# EAGLE board mainboard (EAGLE 7.6.0)
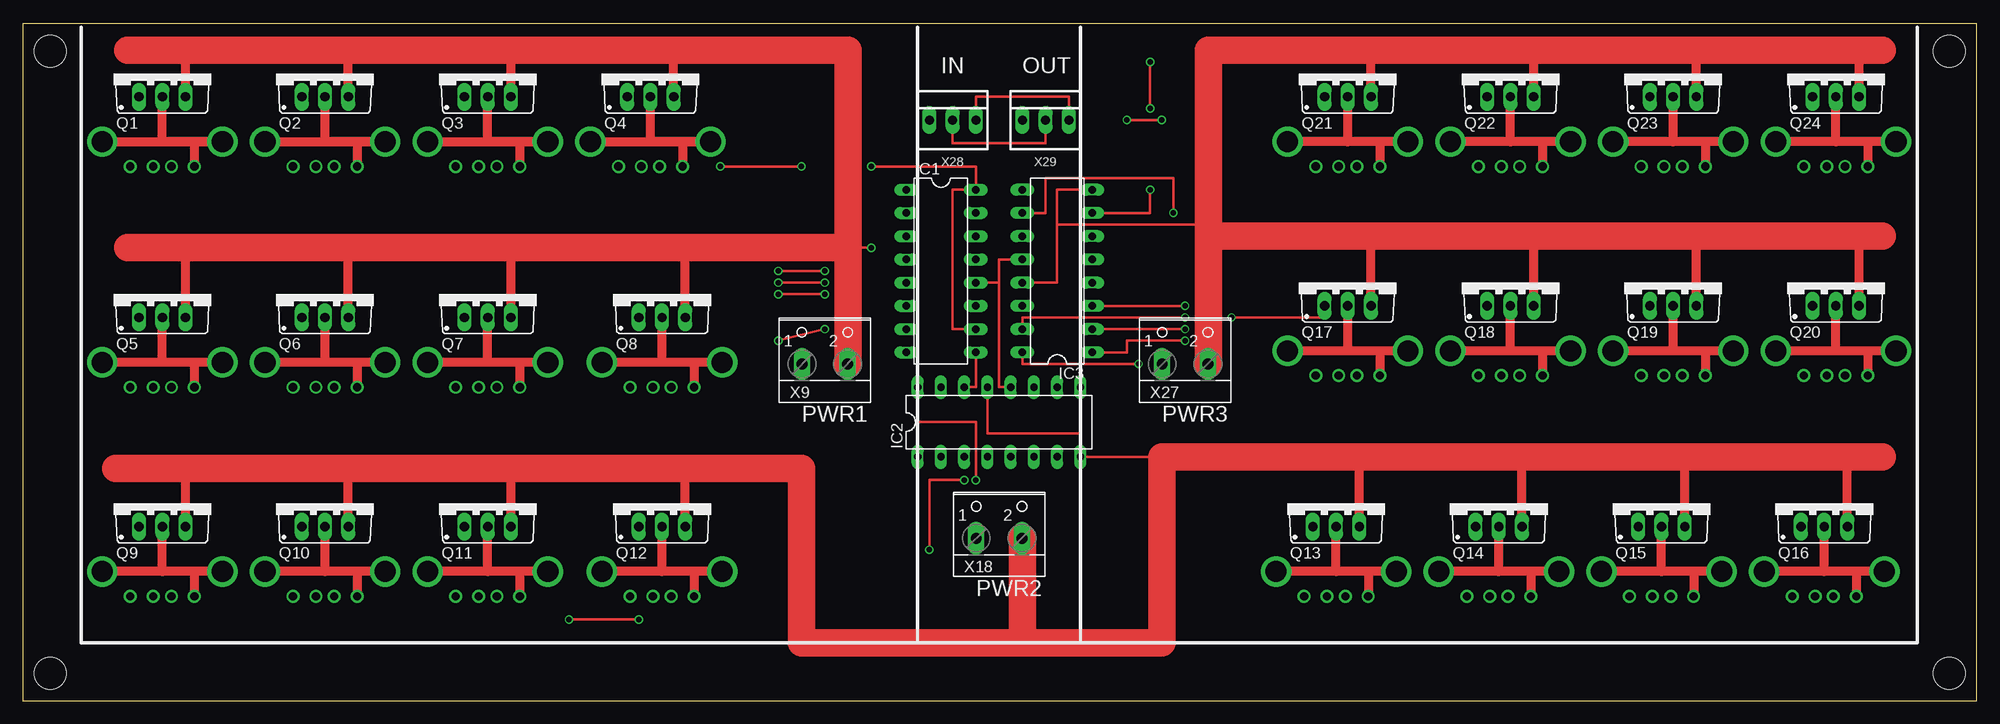
[diagram p0: board, top side]
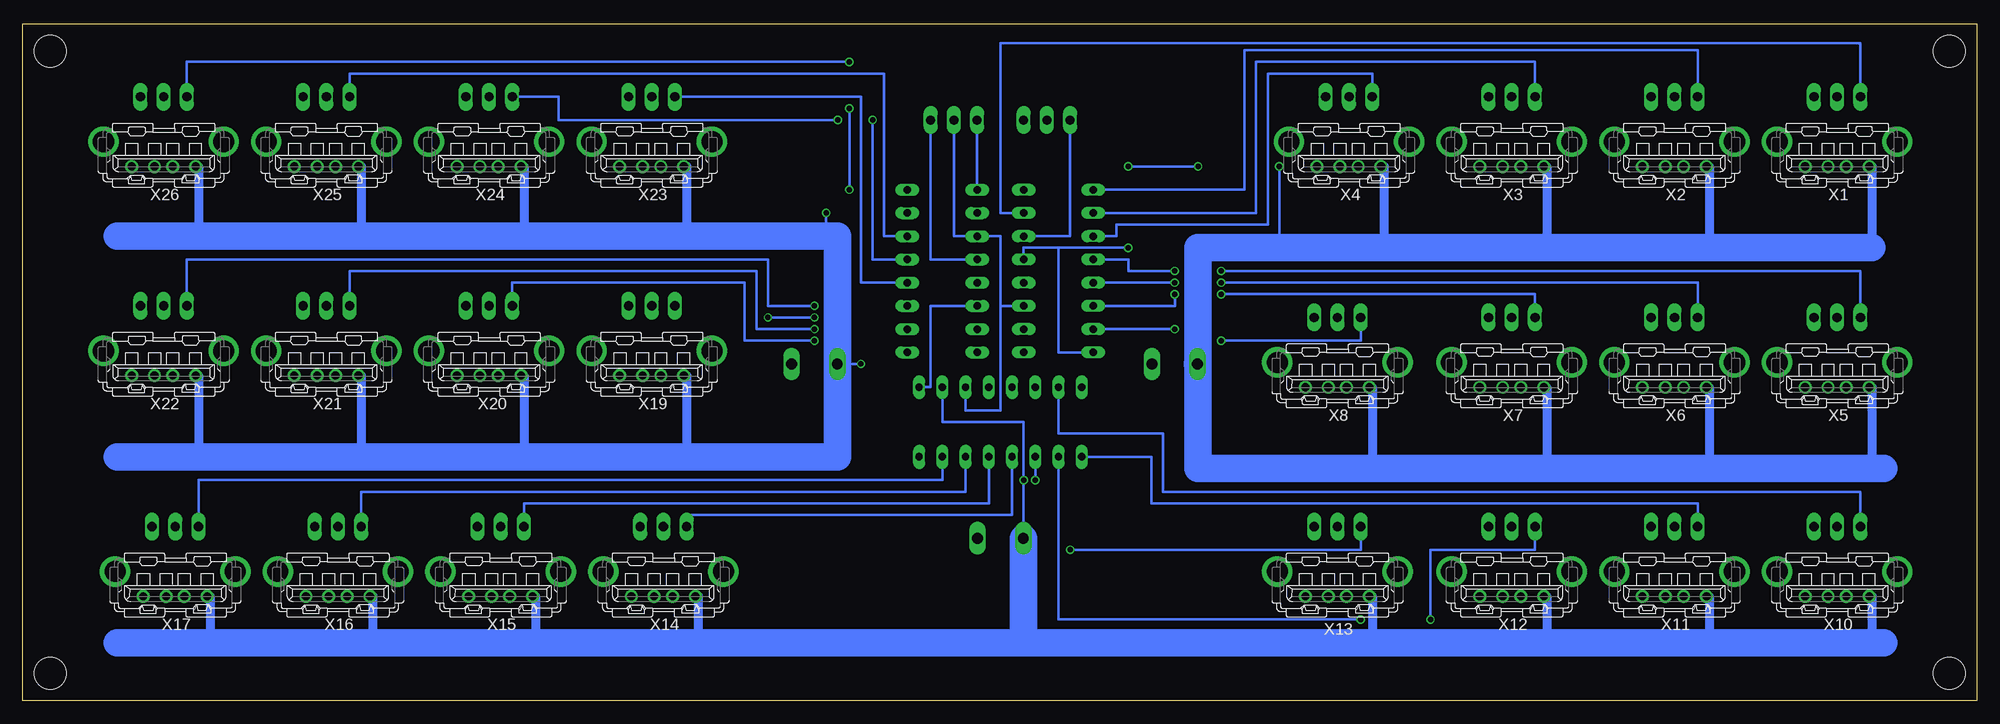
[diagram p1: board, bottom side, seen from below]

Size 213.5 x 74 mm. Coordinates in mm from the lower left corner, seen from the top.
Outline: 0,0 213.5,0 213.5,74 0,74 0,0
Copper layers (1*16): Top 0.035mm / dielectric 1.5mm / Bottom 0.035mm
Design rules "SeeedStudio_2layer_DRU_no_angle_20140221": minimum track width 6mil, minimum drill 12mil, track to track 6mil, track to pad 6mil, pad to pad 6mil, via to via 6mil, smd to smd 0mil, copper to edge 10mil, drill to drill 10mil, minimum pad ring 10mil, minimum via ring 6mil, stop-mask expansion 2mil, vias tented up to drill 100mil, thermal gap 10mil
Holes 3.5 mm at 210.5,71 210.5,3 3,3 3,71

## Footprints (pad centres in the part's own frame; a part is rotated, then mirrored left to right if it is on the bottom)
DIL16 = drill 0.813 long: 1 -8.89,-3.81; 2 -6.35,-3.81; 3 -3.81,-3.81; 4 -1.27,-3.81; 5 1.27,-3.81; 6 3.81,-3.81; 7 6.35,-3.81; 8 8.89,-3.81; 9 8.89,3.81; 10 6.35,3.81; 11 3.81,3.81; 12 1.27,3.81; 13 -1.27,3.81; 14 -3.81,3.81; 15 -6.35,3.81; 16 -8.89,3.81
TO220BV = drill 1.016 long: D 0,-2.54; G -2.54,-2.54; S 2.54,-2.54
KUSBVX = drill 0.9 pad 1.3: 1 3.5,0; 2 1,0; 3 -1,0; 4 -3.5,0 | drill 2.3 pad 2.8: M1 -6.57,2.71; M2 6.57,2.71
W237-102 = drill 1.194 long: 1 -2.5,-1.27; 2 2.5,-1.27
22-23-2031 = drill 1 long: 1 -2.54,0; 2 0,0; 3 2.54,0

## Placement (x,y rotation side)
IC1  74HC595N  [DIL16]  100.33,46.99 270 top
IC2  74HC595N  [DIL16]  106.68,30.48 0 top
IC3  74HC595N  [DIL16]  113.03,46.99 90 top
Q1  IRF540  [TO220BV]  15.24,68.58 0 top
Q2  IRF540  [TO220BV]  33.02,68.58 0 top
Q3  IRF540  [TO220BV]  50.8,68.58 0 top
Q4  IRF540  [TO220BV]  68.58,68.58 0 top
Q5  IRF540  [TO220BV]  15.24,44.45 0 top
Q6  IRF540  [TO220BV]  33.02,44.45 0 top
Q7  IRF540  [TO220BV]  50.8,44.45 0 top
Q8  IRF540  [TO220BV]  69.85,44.45 0 top
Q9  IRF540  [TO220BV]  15.24,21.59 0 top
Q10  IRF540  [TO220BV]  33.02,21.59 0 top
Q11  IRF540  [TO220BV]  50.8,21.59 0 top
Q12  IRF540  [TO220BV]  69.85,21.59 0 top
Q13  IRF540  [TO220BV]  143.51,21.59 0 top
Q14  IRF540  [TO220BV]  161.29,21.59 0 top
Q15  IRF540  [TO220BV]  179.07,21.59 0 top
Q16  IRF540  [TO220BV]  196.85,21.59 0 top
Q17  IRF540  [TO220BV]  144.78,45.72 0 top
Q18  IRF540  [TO220BV]  162.56,45.72 0 top
Q19  IRF540  [TO220BV]  180.34,45.72 0 top
Q20  IRF540  [TO220BV]  198.12,45.72 0 top
Q21  IRF540  [TO220BV]  144.78,68.58 0 top
Q22  IRF540  [TO220BV]  162.56,68.58 0 top
Q23  IRF540  [TO220BV]  180.34,68.58 0 top
Q24  IRF540  [TO220BV]  198.12,68.58 0 top
X1  KUSBVX  [KUSBVX]  15.24,58.42 0 bottom
X2  KUSBVX  [KUSBVX]  33.02,58.42 0 bottom
X3  KUSBVX  [KUSBVX]  50.8,58.42 0 bottom
X4  KUSBVX  [KUSBVX]  68.58,58.42 0 bottom
X5  KUSBVX  [KUSBVX]  15.24,34.29 0 bottom
X6  KUSBVX  [KUSBVX]  33.02,34.29 0 bottom
X7  KUSBVX  [KUSBVX]  50.8,34.29 0 bottom
X8  KUSBVX  [KUSBVX]  69.85,34.29 0 bottom
X9  5v  [W237-102]  87.63,38.1 0 top
X10  KUSBVX  [KUSBVX]  15.24,11.43 0 bottom
X11  KUSBVX  [KUSBVX]  33.02,11.43 0 bottom
X12  KUSBVX  [KUSBVX]  50.8,11.43 0 bottom
X13  KUSBVX  [KUSBVX]  69.85,11.43 0 bottom
X14  KUSBVX  [KUSBVX]  143.51,11.43 0 bottom
X15  KUSBVX  [KUSBVX]  161.29,11.43 0 bottom
X16  KUSBVX  [KUSBVX]  179.07,11.43 0 bottom
X17  KUSBVX  [KUSBVX]  196.85,11.43 0 bottom
X18  5v  [W237-102]  106.68,19.05 0 top
X19  KUSBVX  [KUSBVX]  144.78,35.56 0 bottom
X20  KUSBVX  [KUSBVX]  162.56,35.56 0 bottom
X21  KUSBVX  [KUSBVX]  180.34,35.56 0 bottom
X22  KUSBVX  [KUSBVX]  198.12,35.56 0 bottom
X23  KUSBVX  [KUSBVX]  144.78,58.42 0 bottom
X24  KUSBVX  [KUSBVX]  162.56,58.42 0 bottom
X25  KUSBVX  [KUSBVX]  180.34,58.42 0 bottom
X26  KUSBVX  [KUSBVX]  198.12,58.42 0 bottom
X27  5v  [W237-102]  127,38.1 0 top
X28  22-23-2031  [22-23-2031]  101.6,63.5 0 top
X29  22-23-2031  [22-23-2031]  111.76,63.5 0 top

## Library data of the parts
IC1-IC3 = 74xx-eu
Q1-Q24 = transistor-power
X1-X8 X10-X17 X19-X26 = con-kycon
X9 X18 X27 = con-wago-500; MPN: 237-102; OC_FARNELL: unknown; OC_NEWARK: 70K9898
X28 X29 = con-molex; MF: MOLEX; MPN: 22-23-2031; OC_FARNELL: 1462950; OC_NEWARK: 30C0862

## Nets
B$1: IC2.8 IC2.13 Q9.S Q10.S Q11.S Q12.S Q13.S Q14.S Q15.S Q16.S X18.2
B$2: IC1.8 IC1.13 Q1.S Q2.S Q3.S Q4.S Q5.S Q6.S Q7.S Q8.S X9.2
B$3: IC3.8 IC3.13 Q17.S Q18.S Q19.S Q20.S Q21.S Q22.S Q23.S Q24.S X27.2
N$1: IC1.15 Q1.G
N$2: IC1.1 Q2.G
N$3: IC1.2 Q3.G
N$4: IC1.3 Q4.G
N$5: IC1.4 Q5.G
N$6: IC1.5 Q6.G
N$7: IC1.7 Q8.G
N$8: IC1.6 Q7.G
N$9: Q1.D X1.4 X1.M1 X1.M2
N$10: Q11.D X12.4 X12.M1 X12.M2
N$11: Q3.D X3.4 X3.M1 X3.M2
N$12: Q4.D X4.4 X4.M1 X4.M2
N$13: Q5.D X5.4 X5.M1 X5.M2
N$14: IC1.10 IC1.16 X1.1 X2.1 X3.1 X4.1 X5.1 X6.1 X7.1 X8.1 X9.1
N$15: Q7.D X7.4 X7.M1 X7.M2
N$16: Q16.D X17.4 X17.M1 X17.M2
N$17: Q2.D X2.4 X2.M1 X2.M2
N$18: Q12.D X13.4 X13.M1 X13.M2
N$19: Q6.D X6.4 X6.M1 X6.M2
N$20: Q13.D X14.4 X14.M1 X14.M2
N$21: Q15.D X16.4 X16.M1 X16.M2
N$23: Q14.D X15.4 X15.M1 X15.M2
N$24: IC2.10 IC2.16 X10.1 X11.1 X12.1 X13.1 X14.1 X15.1 X16.1 X17.1 X18.1
N$25: IC1.9 IC2.14
N$26: Q9.D X10.4 X10.M1 X10.M2
N$27: Q10.D X11.4 X11.M1 X11.M2
N$28: IC2.15 Q9.G
N$29: IC2.1 Q10.G
N$30: IC2.2 Q11.G
N$31: IC2.3 Q12.G
N$32: IC2.7 Q16.G
N$33: IC2.4 Q13.G
N$34: IC2.5 Q14.G
N$35: IC2.6 Q15.G
N$36: IC2.9 IC3.14
N$37: IC3.9 X29.1
N$38: Q19.D X21.4 X21.M1 X21.M2
N$39: Q20.D X22.4 X22.M1 X22.M2
N$40: Q21.D X23.4 X23.M1 X23.M2
N$41: Q23.D X25.4 X25.M1 X25.M2
N$43: Q22.D X24.4 X24.M1 X24.M2
N$44: IC3.10 IC3.16 X19.1 X20.1 X21.1 X22.1 X23.1 X24.1 X25.1 X26.1 X27.1
N$45: Q8.D X8.4 X8.M1 X8.M2
N$46: Q17.D X19.4 X19.M1 X19.M2
N$47: Q18.D X20.4 X20.M1 X20.M2
N$48: IC3.15 Q17.G
N$49: IC3.1 Q18.G
N$50: IC3.2 Q19.G
N$51: IC3.3 Q20.G
N$52: IC3.7 Q24.G
N$53: IC3.4 Q21.G
N$54: IC3.5 Q22.G
N$55: IC1.14 X28.1
N$56: IC3.6 Q23.G
N$57: Q24.D X26.4 X26.M1 X26.M2
N$58: IC1.12 IC2.12 IC3.12 X28.3 X29.3
N$59: IC1.11 IC2.11 IC3.11 X28.2 X29.2

## Tracks (layer width: path | path; a pad name or v marks a point on that pad's centre or on a via)
B$1
  Top 0.254: IC2.13 105.41,29.21 115.57,29.21 IC2.8 124.46,26.67
  Top 1: Q12.S 72.39,25.4 | Q11.S 53.34,25.4 | Q10.S 35.56,25.4 | Q9.S 17.78,25.4 | Q16.S 199.39,26.67 | Q15.S 181.61,26.67 | Q14.S 163.83,26.67 | Q13.S 146.05,26.67
  Top 3: X18.2 109.22,17.78 109.22,6.35 | 109.22,6.35 85.09,6.35 85.09,25.4 72.39,25.4 53.34,25.4 35.56,25.4 17.78,25.4 10.16,25.4 | 109.22,6.35 124.46,6.35 124.46,26.67 146.05,26.67 163.83,26.67 181.61,26.67 199.39,26.67 203.2,26.67
B$2  (via drill 0.6)
  Top 0.254: v92.71,49.53 90.17,49.53
  Top 1: Q1.S 17.78,71.12 | Q2.S 35.56,71.12 | Q3.S 53.34,71.12 | Q4.S 71.12,71.12 | Q5.S 17.78,49.53 | Q6.S 35.56,49.53 | Q7.S 53.34,49.53 | Q8.S 72.39,49.53
  Top 3: 90.17,49.53 90.17,71.12 71.12,71.12 53.34,71.12 35.56,71.12 17.78,71.12 11.43,71.12 | X9.2 90.17,36.83 90.17,49.53 | 90.17,49.53 72.39,49.53 53.34,49.53 35.56,49.53 17.78,49.53 11.43,49.53
  Bottom 0.254: IC1.13 104.14,49.53 100.33,49.53 | 100.33,49.53 v92.71,49.53 | 100.33,49.53 100.33,38.1 IC1.8
B$3
  Top 0.254: 113.03,52.07 129.54,52.07 | IC3.13 113.03,45.72 113.03,52.07 | 113.03,52.07 113.03,55.88 IC3.8
  Top 1: Q20.S 200.66,50.8 | Q24.S 200.66,71.12 | Q23.S 182.88,71.12 | Q22.S 165.1,71.12 | Q21.S 147.32,71.12 | Q17.S 147.32,50.8 | Q18.S 165.1,50.8 | Q19.S 182.88,50.8
  Top 3: 129.54,50.8 129.54,36.83 X27.2 | 129.54,50.8 147.32,50.8 165.1,50.8 182.88,50.8 200.66,50.8 203.2,50.8 | 129.54,50.8 129.54,52.07 129.54,71.12 147.32,71.12 165.1,71.12 182.88,71.12 200.66,71.12 203.2,71.12
N$1
  Bottom 0.254: Q1.G 12.7,71.88 106.68,71.88 106.68,53.34 IC1.15
N$2
  Bottom 0.254: Q2.G 30.48,71.12 80.01,71.12 80.01,55.88 IC1.1
N$3
  Bottom 0.254: Q3.G 48.26,69.85 78.74,69.85 78.74,53.34 IC1.2
N$4
  Bottom 0.254: Q4.G 66.04,68.58 77.47,68.58 77.47,52.07 93.98,52.07 93.98,50.8 IC1.3
N$5  (via drill 0.6)
  Top 0.254: v87.63,46.99 v82.55,46.99
  Bottom 0.254: IC1.4 92.71,48.26 92.71,46.99 v87.63,46.99 | v82.55,46.99 12.7,46.99 Q5.G
N$6  (via drill 0.6)
  Top 0.254: v87.63,45.72 v82.55,45.72
  Bottom 0.254: IC1.5 v87.63,45.72 | v82.55,45.72 30.48,45.72 Q6.G
N$7  (via drill 0.6)
  Top 0.254: v87.63,40.64 v82.55,39.37
  Bottom 0.254: IC1.7 v87.63,40.64 | v82.55,39.37 67.31,39.37 Q8.G
N$8  (via drill 0.6)
  Top 0.254: v87.63,44.45 v82.55,44.45
  Bottom 0.254: IC1.6 87.63,43.18 v87.63,44.45 | v82.55,44.45 48.26,44.45 Q7.G
N$9
  Top 1: X1.M2 X1.M1 | X1.M1 18.74,61.13 X1.4 | X1.M1 15.24,61.13 Q1.D
N$10
  Top 1: X12.M1 X12.M2 | X12.M1 50.8,14.14 Q11.D | X12.M1 54.3,14.14 X12.4
N$11
  Top 1: X3.M2 X3.M1 | X3.M1 54.3,61.13 X3.4 | X3.M1 50.8,61.13 Q3.D
N$12
  Top 1: X4.M2 X4.M1 | X4.M1 72.08,61.13 X4.4 | X4.M1 68.58,61.13 Q4.D
N$13
  Top 1: X5.M1 X5.M2 | X5.M1 18.74,37 X5.4 | X5.M1 15.24,37 Q5.D
N$14  (via drill 0.6)
  Top 0.254: v92.71,58.42 104.14,58.42 IC1.16 101.6,55.88 101.6,40.64 IC1.10 | v85.09,58.42 v76.2,58.42
  Bottom 0.254: v92.71,58.42 v85.09,58.42 | v76.2,58.42 76.2,49.53
  Bottom 1: X1.1 11.43,58.42 11.43,49.53 | X2.1 29.21,58.42 29.21,49.53 | X3.1 46.99,58.42 46.99,49.53 | X4.1 64.77,58.42 64.77,49.53 | X5.1 11.43,34.29 11.43,25.4 | X6.1 29.21,34.29 29.21,25.4 | X7.1 46.99,34.29 46.99,25.4 | X8.1 66.04,34.29 66.04,25.4
  Bottom 3: X9.1 85.09,36.83 | 11.43,49.53 29.21,49.53 46.99,49.53 64.77,49.53 76.2,49.53 85.09,49.53 85.09,36.83 | 85.09,36.83 85.09,25.4 66.04,25.4 46.99,25.4 29.21,25.4 11.43,25.4 10.16,25.4
N$15
  Top 1: X7.M1 X7.M2 | X7.M1 54.3,37 X7.4 | X7.M1 50.8,37 Q7.D
N$16
  Top 1: X17.M1 X17.M2 | X17.M1 196.85,14.14 Q16.D | X17.M1 200.35,14.14 X17.4
N$17
  Top 1: X2.M2 X2.M1 | X2.M1 36.52,61.13 X2.4 | X2.M1 33.02,61.13 Q2.D
N$18
  Top 1: X13.M1 X13.M2 | X13.M1 69.85,14.14 Q12.D | X13.M1 73.35,14.14 X13.4
N$19
  Top 1: X6.M1 X6.M2 | X6.M1 36.52,37 X6.4 | X6.M1 33.02,37 Q6.D
N$20
  Top 1: X14.M1 X14.M2 | X14.M1 143.51,14.14 Q13.D | X14.M1 147.01,14.14 X14.4
N$21
  Top 1: X16.M1 X16.M2 | X16.M1 179.07,14.14 Q15.D | X16.M1 182.57,14.14 X16.4
N$23
  Top 1: X15.M1 X15.M2 | X15.M1 161.29,14.14 Q14.D | X15.M1 164.79,14.14 X15.4
N$24  (via drill 0.6)
  Top 0.254: IC2.16 97.79,30.48 104.14,30.48 v104.14,24.13
  Bottom 0.254: X18.1 104.18,24.13 v104.14,24.13 104.14,30.48 113.03,30.48 IC2.10
  Bottom 1: X10.1 11.43,11.43 11.43,6.35 | X11.1 29.21,11.43 29.21,6.35 | X12.1 46.99,11.43 46.99,6.35 | X13.1 66.04,11.43 66.04,6.35 | X14.1 139.7,11.43 139.7,6.35 | X15.1 157.48,11.43 157.48,6.35 | X16.1 175.26,11.43 175.26,6.35 | X17.1 193.04,11.43 193.04,6.35
  Bottom 3: X18.1 104.14,17.78 104.14,6.35 | 104.14,6.35 66.04,6.35 46.99,6.35 29.21,6.35 11.43,6.35 10.16,6.35 | 104.14,6.35 139.7,6.35 157.48,6.35 175.26,6.35 193.04,6.35 203.2,6.35
N$25
  Top 0.254: IC1.9 104.14,34.29 IC2.14
N$26
  Top 1: X10.M1 X10.M2 | X10.M1 15.24,14.14 Q9.D | X10.M1 18.74,14.14 X10.4
N$27
  Top 1: 33.02,14.14 X11.M2 | X11.M1 36.52,14.14 | 36.52,14.14 X11.4 | 36.52,14.14 33.02,14.14 | 33.02,14.14 Q10.D
N$28
  Bottom 0.254: Q9.G 12.7,22.86 88.9,22.86 88.9,29.21 100.33,29.21 IC2.15
N$29
  Bottom 0.254: IC2.1 90.17,26.67 90.17,21.59 30.48,21.59 Q10.G
N$30  (via drill 0.6)
  Top 0.254: v67.31,8.89 v59.69,8.89
  Bottom 0.254: IC2.2 100.33,8.89 v67.31,8.89 | v59.69,8.89 59.69,16.51 48.26,16.51 Q11.G
N$31  (via drill 0.6)
  Top 0.254: v102.87,24.13 99.06,24.13 v99.06,16.51
  Bottom 0.254: IC2.3 v102.87,24.13 | v99.06,16.51 67.31,16.51 Q12.G
N$32
  Bottom 0.254: IC2.7 113.03,24.13 194.31,24.13 Q16.G
N$33
  Bottom 0.254: IC2.4 105.41,20.32 140.97,20.32 Q13.G
N$34
  Bottom 0.254: IC2.5 107.95,21.59 158.75,21.59 Q14.G
N$35
  Bottom 0.254: IC2.6 110.49,22.86 176.53,22.86 Q15.G
N$36
  Bottom 0.254: IC2.9 114.3,34.29 114.3,43.18 IC3.14
N$37
  Bottom 0.254: IC3.9 X29.1
N$38
  Top 1: X21.M1 X21.M2 | X21.M1 180.34,38.27 Q19.D | X21.M1 183.84,38.27 X21.4
N$39
  Top 1: X22.M1 X22.M2 | X22.M1 198.12,38.27 Q20.D | X22.M1 201.62,38.27 X22.4
N$40
  Top 1: X23.M1 X23.M2 | X23.M1 144.78,61.13 Q21.D | X23.M1 148.28,61.13 X23.4
N$41
  Top 1: X25.M1 X25.M2 | X25.M1 180.34,61.13 Q23.D | X25.M1 183.84,61.13 X25.4
N$43
  Top 1: X24.M1 X24.M2 | X24.M1 162.56,61.13 Q22.D | X24.M1 166.06,61.13 X24.4
N$44  (via drill 0.6)
  Top 0.254: IC3.10 111.76,53.34 111.76,57.15 125.73,57.15 v125.73,53.34 | IC3.16 109.22,36.83 v121.92,36.83
  Bottom 0.254: v125.73,53.34 125.73,50.8 | v121.92,36.83 X27.1
  Bottom 1: X22.1 194.31,35.56 194.31,26.67 | X21.1 176.53,35.56 176.53,26.67 | X20.1 158.75,35.56 158.75,26.67 | X19.1 140.97,35.56 140.97,26.67 | X26.1 194.31,58.42 194.31,50.8 | X25.1 176.53,58.42 176.53,50.8 | X24.1 158.75,58.42 158.75,50.8 | X23.1 140.97,58.42 140.97,50.8
  Bottom 3: 124.46,36.83 124.46,26.67 140.97,26.67 158.75,26.67 176.53,26.67 194.31,26.67 203.2,26.67 | X27.1 124.46,36.83 | 124.46,36.83 124.46,50.8 125.73,50.8 140.97,50.8 158.75,50.8 176.53,50.8 194.31,50.8 203.2,50.8
N$45
  Top 1: 73.35,37 X8.4 | X8.M1 73.35,37 | 69.85,37 X8.M2 | 73.35,37 69.85,37 | 69.85,37 Q8.D
N$46
  Top 1: X19.M1 X19.M2 | X19.M1 144.78,38.27 Q17.D | X19.M1 148.28,38.27 X19.4
N$47
  Top 1: X20.M1 X20.M2 | X20.M1 162.56,38.27 Q18.D | X20.M1 166.06,38.27 X20.4
N$48  (via drill 0.6)
  Top 0.254: IC3.15 109.22,41.91 v127,41.91 | v132.08,41.91 142.24,41.91 Q17.G
  Bottom 0.254: v127,41.91 v132.08,41.91
N$49  (via drill 0.6)
  Top 0.254: IC3.1 120.65,38.1 120.65,39.37 v127,39.37
  Bottom 0.254: v127,39.37 134.62,39.37 134.62,45.72 160.02,45.72 Q18.G
N$50  (via drill 0.6)
  Top 0.254: IC3.2 v127,40.64
  Bottom 0.254: v127,40.64 133.35,40.64 133.35,46.99 177.8,46.99 Q19.G
N$51  (via drill 0.6)
  Top 0.254: IC3.3 v127,43.18
  Bottom 0.254: v127,43.18 132.08,43.18 132.08,48.26 195.58,48.26 Q20.G
N$52  (via drill 0.6)
  Top 0.254: IC3.7 123.19,53.34 v123.19,55.88 | v123.19,64.77 v123.19,69.85
  Bottom 0.254: Q24.G 195.58,69.85 v123.19,69.85 | v123.19,55.88 v123.19,64.77
N$53
  Bottom 0.254: Q21.G 121.92,66.04 121.92,45.72 IC3.4
N$54  (via drill 0.6)
  Top 0.254: v120.65,63.5 v124.46,63.5
  Bottom 0.254: IC3.5 120.65,48.26 v120.65,63.5 | v124.46,63.5 154.94,63.5 154.94,66.04 Q22.G
N$55
  Bottom 0.254: X28.1 99.06,50.8 IC1.14
N$56
  Bottom 0.254: Q23.G 177.8,68.58 119.38,68.58 119.38,50.8 IC3.6
N$57
  Top 1: X26.M1 X26.M2 | X26.M1 198.12,61.13 Q24.D | X26.M1 201.62,61.13 X26.4
N$58
  Top 0.254: IC2.12 106.68,34.29 106.68,45.72 | 106.68,45.72 IC1.12 | X28.3 104.14,66.04 114.3,66.04 X29.3 | IC3.12 106.68,48.26 106.68,45.72
  Bottom 0.254: IC3.12 114.3,48.26 X29.3
N$59
  Top 0.254: X28.2 101.6,60.96 111.76,60.96 X29.2
  Bottom 0.254: X29.2 111.76,50.8 IC3.11 106.68,50.8 106.68,43.18 | IC1.11 106.68,43.18 | 106.68,43.18 106.68,31.75 110.49,31.75 IC2.11

## Text on the board
tPlace: IN | OUT | PWR1 | PWR3 | PWR2